# EAGLE board Weather Shield (EAGLE 7.3.0)
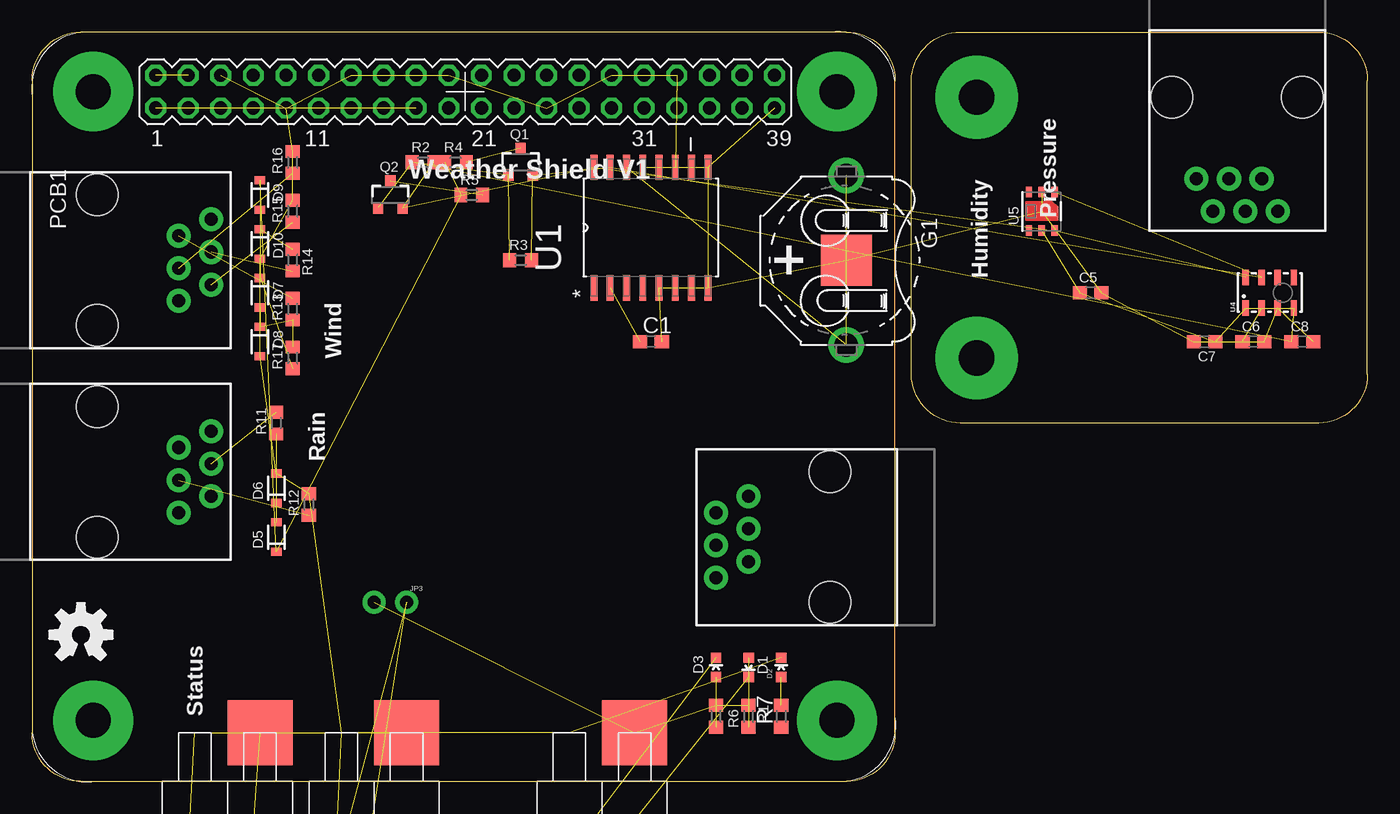
[diagram p0: board, top side]
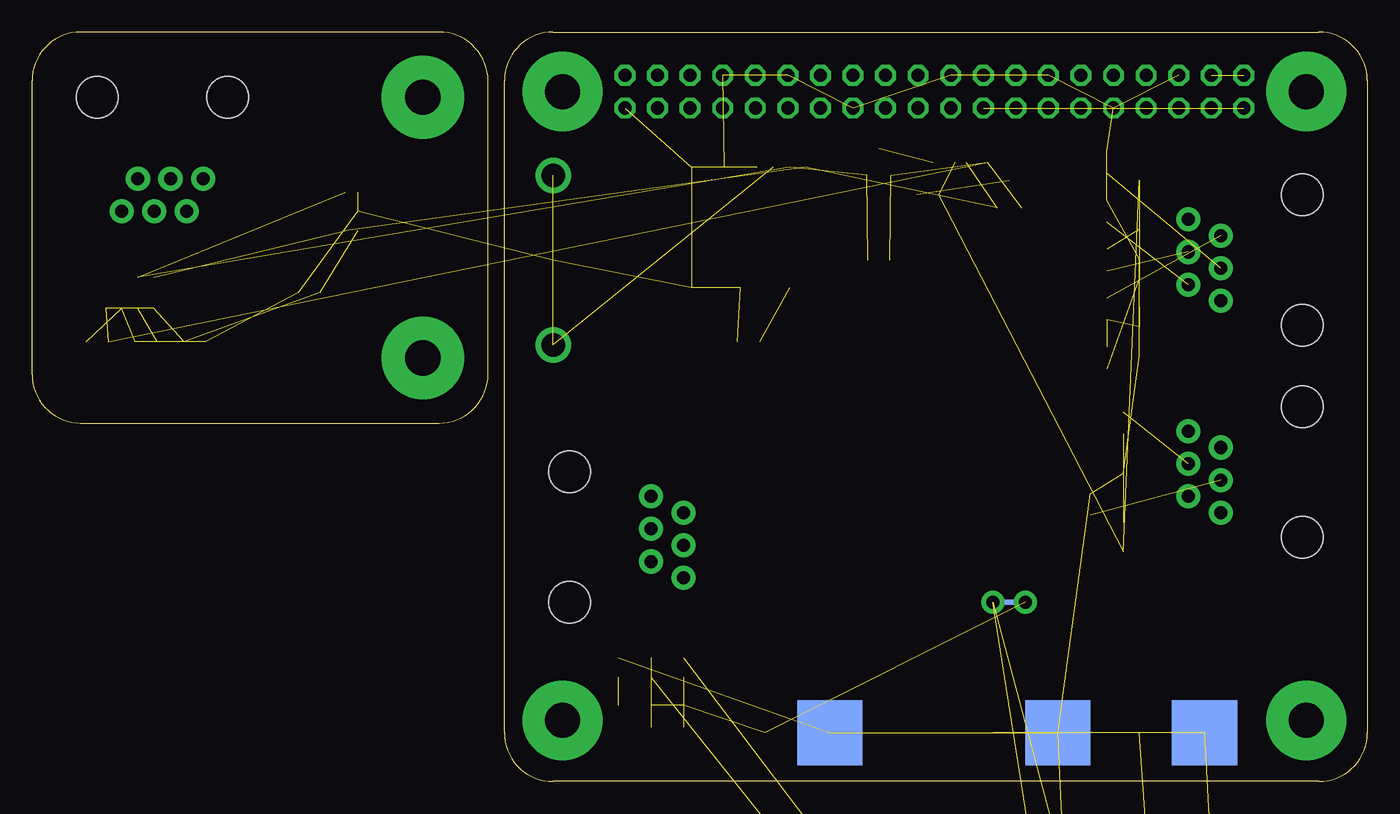
[diagram p1: board, bottom side, seen from below]

Size 104.14 x 58.42 mm. Coordinates in mm from the lower left corner, seen from the top.
Outline: 72.39,27.94 arc-90 68.58,31.75 68.58,54.61 arc-90 72.39,58.42 100.33,58.42 arc-90 104.14,54.61 104.14,31.75 arc-90 100.33,27.94 72.39,27.94
Outline: 0,54.61 arc-90 3.81,58.42 63.5,58.42 arc-90 67.31,54.61 67.31,3.81 arc-90 63.5,0 3.81,0 arc-90 0,3.81 0,54.61
Copper layers (1*16): Top 0.035mm / dielectric 1.5mm / Bottom 0.035mm
Design rules "SparkFun": minimum track width 8mil, minimum drill 20mil, track to track 8mil, track to pad 8mil, pad to pad 8mil, via to via 8mil, smd to smd 8mil, copper to edge 10mil, drill to drill 8mil, minimum pad ring 12mil, minimum via ring 10mil, stop-mask expansion 4mil, vias tented up to drill 20mil, thermal gap 10mil
Net classes: 1 vcc: width 0.203 mm
tRestrict: area 12.7,22.9 to 39.4,35.6
bRestrict: area 12.7,22.9 to 39.4,35.6

## Footprints (pad centres in the part's own frame; a part is rotated, then mirrored left to right if it is on the bottom)
C0603 = smd 1.1 x 1: 1 -0.85,0; 2 0.85,0
EIA3528 = smd 1.2 x 2.5: A 1.65,0; C -1.65,0
LED-0603 = smd 0.8 x 0.8: A 0,-0.75; C 0,0.75
SOT23 = smd 1 x 1.4: 1 -0.95,-1.1; 2 0.95,-1.1; 3 0,1.1
SOD-323 = smd 0.63 x 0.83: 1 -1.15,0; 2 1.15,0
CELL_RETAINER_11.6MM = smd 3.96 x 3.96: N- 0,0 | drill 1.85 pad 2.54: P+@1 -6.605,0; P+@2 6.605,0
SCREWTERMINAL-3.5MM-2 = drill 1.2 pad 2.032 square: 1 0,0 | drill 1.2 pad 2.032: 2 3.5,0
SJ_2S = smd 0.635 x 1.27: 1 -0.412,0; 2 0.412,0
SJ_2S-NO = smd 0.635 x 1.27: 1 -0.45,0; 2 0.45,0
PTH-JUMPER-NC_BOTTOM_NO_SILK = drill 1.016 pad 1.778: 1 -1.27,0; 2 1.27,0 | smd 1.27 x 0.381 bottom: P$1 0,0
RJ11-6 = drill 1.016 pad 1.88: 1 1.905,8.89; 2 3.175,6.35; 3 4.445,8.89; 4 5.715,6.35; 5 6.985,8.89; 6 8.255,6.35 | hole 3.251: 0,0; 10.16,0
CR75 = smd 1.75 x 4.7: P$1 0,0; P$2 6.05,0
RASPBERRY_PI_BPLUS_DIM = drill 1.016 octagon: 1 9.64,52.5; 2 9.64,55.04; 3 12.18,52.5; 4 12.18,55.04; 5 14.72,52.5; 6 14.72,55.04; 7 17.26,52.5; 8 17.26,55.04; 9 19.8,52.5; 10 19.8,55.04; 11 22.34,52.5; 12 22.34,55.04; 13 24.88,52.5; 14 24.88,55.04; 15 27.42,52.5; 16 27.42,55.04; 17 29.96,52.5; 18 29.96,55.04; 19 32.5,52.5; 20 32.5,55.04; 21 35.04,52.5; 22 35.04,55.04; 23 37.58,52.5; 24 37.58,55.04; 25 40.12,52.5; 26 40.12,55.04; 27 42.66,52.5; 28 42.66,55.04; 29 45.2,52.5; 30 45.2,55.04; 31 47.74,52.5; 32 47.74,55.04; 33 50.28,52.5; 34 50.28,55.04; 35 52.82,52.5; 36 52.82,55.04; 37 55.36,52.5; 38 55.36,55.04; 39 57.9,52.5; 40 57.9,55.04 | drill 2.75 pad 6.2: PE_BL 4.77,4.77; PE_TL 4.77,53.77; PE_TR 62.77,53.77; PE_TR1 62.77,4.77
SOT23-3 = smd 0.8 x 0.9: 1 -0.95,-1; 2 0.95,-1; 3 0,1.1
R0603 = smd 1 x 1.1: 1 -0.85,0; 2 0.85,0
S64Y = drill 0.813 long: A 2.54,1.27; E -2.54,1.27; S 0,-1.27
B1,27 = smd 1.27 x 1.27: TP 0,0
SOIC127P1032X265-16N = smd 1.981 x 0.533: 1 -4.699,4.445; 2 -4.699,3.175; 3 -4.699,1.905; 4 -4.699,0.635; 5 -4.699,-0.635; 6 -4.699,-1.905; 7 -4.699,-3.175; 8 -4.699,-4.445; 9 4.699,-4.445; 10 4.699,-3.175; 11 4.699,-1.905; 12 4.699,-0.635; 13 4.699,0.635; 14 4.699,1.905; 15 4.699,3.175; 16 4.699,4.445
MSOP-12_GND = smd 0.889 x 0.42: 1 -2.1,1.625; 2 -2.1,0.975; 3 -2.1,0.325; 4 -2.1,-0.325; 5 -2.1,-0.975; 6 -2.1,-1.625; 7 2.1,-1.625; 8 2.1,-0.975; 9 2.1,-0.325; 10 2.1,0.325; 11 2.1,0.975; 12 2.1,1.625 | smd 1.651 x 2.845: 13 0,0
LGA8 = smd 1.2 x 0.5: 1 -1.2,1.875; 2 -1.2,0.625; 3 -1.2,-0.625; 4 -1.2,-1.875; 5 1.2,-1.875; 6 1.2,-0.625; 7 1.2,0.625; 8 1.2,1.875
HTU21D = smd 0.2 x 0.2: 7 0,0 | smd 0.8 x 0.5: DATA 1.5,-1; GND 1.5,0; NC@1 -1.5,1; NC@6 1.5,1; SCK -1.5,-1; VDD -1.5,0
DEAN_CONNECTOR = smd 5.08 x 5.08: 1 2.54,3.81 | smd 5.08 x 5.08 bottom: 2 -2.54,3.81

## Placement (x,y rotation side)
C1  0.1uF  [C0603]  48.26,34.29 0 top
C2  10uF  [C0603]  16.51,-73.66 0 top  (outside the outline)
C3  47uF  [EIA3528]  22.86,-57.15 0 top  (outside the outline)
C4  47uF  [EIA3528]  -3.81,-64.77 0 top  (outside the outline)
C5  0.1uF  [C0603]  82.55,38.1 0 top
C6  0.1uF  [C0603]  95.25,34.29 0 top
C7  0.1uF  [C0603]  91.44,34.29 180 top
C8  1uF  [C0603]  99.06,34.29 0 top
C9  10uF  [C0603]  1.27,-68.58 0 top  (outside the outline)
C10  1.0uF  [C0603]  19.05,-68.58 0 top  (outside the outline)
C11  1.0uF  [C0603]  22.86,-68.58 0 top  (outside the outline)
D1  Red  [LED-0603]  55.88,8.89 180 top
D2  Blue  [LED-0603]  58.42,8.89 0 top
D3  Green  [LED-0603]  53.34,8.89 0 top
D4  ZLLS500  [SOT23]  13.97,-63.5 0 top  (outside the outline)
D5  BAS16  [SOD-323]  19.05,19.05 90 top
D6  BAS16  [SOD-323]  19.05,22.86 90 top
D7  BAS16  [SOD-323]  17.78,38.1 270 top
D8  BAS16  [SOD-323]  17.78,34.29 270 top
D9  BAS16  [SOD-323]  17.78,45.72 270 top
D10  BAS16  [SOD-323]  17.78,41.91 270 top
D11  ZLLS500  [SOT23]  17.78,-63.5 0 top  (outside the outline)
G1  3V  [CELL_RETAINER_11.6MM]  63.5,40.64 270 top
J7  M023.5MM  [SCREWTERMINAL-3.5MM-2]  3.81,-57.15 0 top  (outside the outline)
J8  M023.5MM  [SCREWTERMINAL-3.5MM-2]  12.7,-57.15 0 top  (outside the outline)
JP1  [SJ_2S]  8.89,-74.93 0 top  (outside the outline)
JP2  [SJ_2S-NO]  12.7,-74.93 0 top  (outside the outline)
JP3  JUMPER-PTH-2-NC  [PTH-JUMPER-NC_BOTTOM_NO_SILK]  27.94,13.97 180 top
JP9-DNP  RJ11-RAIN  [RJ11-6]  5.08,29.21 270 top
JP9-DNP1  [RJ11-6]  62.23,13.97 90 top
JP9-DNP2  [RJ11-6]  99.06,53.34 180 top
JP10-DNP  RJ11-WIND  [RJ11-6]  5.08,45.72 270 top
L1  68uH  [CR75]  2.54,-46.99 0 top  (outside the outline)
LOGO1  OSHW-LOGOM  [OSHW-LOGO-M]  3.81,11.43 0 top
PCB1  RASPBERRY_PI_B+/PI2_DIM  [RASPBERRY_PI_BPLUS_DIM]  0,0 0 top
Q1  BSS138  [SOT23-3]  38.1,48.26 0 top
Q2  BSS138  [SOT23-3]  27.94,45.72 0 top
R1  1K  [R0603]  55.88,5.08 270 top
R2  4.7K  [R0603]  30.48,48.26 0 top
R3  4.7K  [R0603]  38.1,40.64 0 top
R4  4.7K  [R0603]  33.02,48.26 0 top
R5  4.7K  [R0603]  34.29,45.72 0 top
R6  1K  [R0603]  53.34,5.08 270 top
R7  1K  [R0603]  58.42,5.08 90 top
R8  0.2  [R0603]  6.35,-68.58 0 top  (outside the outline)
R9  9.1k  [R0603]  26.67,-68.58 0 top  (outside the outline)
R10  24k  [R0603]  -6.35,-73.66 0 top  (outside the outline)
R11  1K  [R0603]  19.05,27.94 90 top
R12  1K  [R0603]  21.59,21.59 90 top
R13  1K  [R0603]  20.32,36.83 90 top
R14  1K  [R0603]  20.32,40.64 270 top
R15  1K  [R0603]  20.32,44.45 90 top
R16  1K  [R0603]  20.32,48.26 90 top
R17  4.7K  [R0603]  20.32,33.02 90 top
R20  220k  [R0603]  5.08,-73.66 0 top  (outside the outline)
R21  not fitted  [R0603]  -6.35,-93.98 0 top  (outside the outline)
R22  10k  [S64Y]  -2.54,-86.36 0 top  (outside the outline)
R23  not fitted  [R0603]  -6.35,-97.79 0 top  (outside the outline)
TP1  SET  [B1,27]  -6.35,-80.01 0 top  (outside the outline)
U1  DS3231SN  [SOIC127P1032X265-16N]  48.26,43.18 90 top
U2  LT3652  [MSOP-12_GND]  -5.08,-69.85 0 top  (outside the outline)
U4  MPL3115A2LGA8  [LGA8]  96.52,38.1 90 top
U5  HTU21D  [HTU21D]  78.74,44.45 90 top
U$1  DEAN_CONNECTOR  [DEAN_CONNECTOR]  15.24,0 0 top
U$2  DEAN_CONNECTOR  [DEAN_CONNECTOR]  26.67,0 0 top
U$3  DEAN_CONNECTOR  [DEAN_CONNECTOR]  44.45,0 0 top

## Library data of the parts
C1 C2 C5-C11 R1-R17 R20 R21 R23 = rcl
C3 C4 = SparkFun-Capacitors; PROD_ID: CAP-08310
D1-D3 D5-D10 JP9-DNP JP9-DNP1 JP9-DNP2 JP10-DNP Q1 Q2 = SparkFun
D4 D11 = SparkFun-DiscreteSemi; PROD_ID: DIO-08411
G1 = battery; MF: KEYSTONE; MPN: 2997; OC_FARNELL: 2293265
J7 J8 = SparkFun-Connectors
JP1-JP3 = SparkFun-Passives
L1 = SparkFun-Passives; PROD_ID: NDUC-09739
LOGO1 = SparkFun-Aesthetics
PCB1 U$1-U$3 = FSE_Weather_Shield
R22 = pot
TP1 = testpad
U1 = FSE_Weather_Shield; MPN: DS3231SN#; OC_FARNELL: 1593292; OC_NEWARK: 68K3406; PACKAGE: SOIC-16; SUPPLIER: Maxim
U2 = SparkFun-PowerIC
U4 U5 = SparkFun-Sensors

## Nets
3.3V: C5.1 C7.1 C8.1 Q1.1 Q2.1 R2.1 R3.1 U4.1 U4.4 U5.VDD
3V3: PCB1.1 PCB1.17
5V: D5.1 D7.1 D9.1 R4.1 R5.1 R17.1
5V0: PCB1.2 PCB1.4
!CHRG: D3.C U2.4
!FAULT: D1.C U2.5
BOOST: C10.1 D11.3 U2.11
FB: R9.2 R10.1 R20.2
GND [vcc]: C1.2 C2.2 C3.C C4.C C5.2 C6.2 C7.2 C8.2 C9.2 C11.1 D2.C D4.1 D6.2 D8.2 D10.2 G1.N- J8.2 PCB1.6 PCB1.9 PCB1.14 PCB1.20 PCB1.25 PCB1.30 PCB1.34 PCB1.39 R9.1 R12.2 R15.2 R16.2 R22.A U1.5 U1.6 U1.7 U1.8 U1.9 U1.10 U1.11 U1.12 U1.13 U2.13 U4.3 U5.7 U5.GND U$2.2 U$3.2
HV_SCL: Q2.3 R5.2
HV_SDA: Q1.3 R4.2
INT-PRESSURE: U4.6
N$1: JP10-DNP.3 R14.2
N$2: JP10-DNP.2 R13.2
N$3: D1.A R1.2
N$4: JP9-DNP.3 R11.2
N$5: C6.1 U4.2
N$6: G1.P+@1 G1.P+@2 U1.14
N$7: D3.A R6.2
N$10: D2.A R7.2
N$11: JP9-DNP.4 R12.1
N$12: JP10-DNP.5 R15.1
N$13: JP10-DNP.4 R16.1
N$14: J7.2 J8.1 JP1.1 U$1.2 U$2.1
N$15: R20.1 U2.7
N$16: C3.A C4.A C9.1 D11.1 JP3.1 R8.2 R10.2 R21.2 R23.2 U2.9
RAIN: D5.2 D6.1 R11.1
RAIN2: JP9-DNP.2
RAIN5: JP9-DNP.5
SCL: Q2.2 R2.2 U1.16 U4.8 U5.SCK
SDA: Q1.2 R3.2 U1.15 U4.7 U5.DATA
SENSE: L1.P$2 R8.1 R21.1 R23.1 U2.10
SET: R22.S TP1.TP U2.2
SFSASDF: J7.1 JP2.1 U$1.1
STAT3: R7.1
SW: C10.2 D4.3 L1.P$1 U2.12
TIMER: C11.2 U2.6
V_BATT: JP3.2 R1.1 R6.1 U$3.1
VCC: C1.1 U1.2
VIN: C2.1 JP1.2 JP2.2 R22.E U2.1 U2.3
WDIR: D7.2 D8.1 R13.1 R17.2
WSPEED: D9.2 D10.1 R14.1

## Tracks (layer width: path | path; a pad name or v marks a point on that pad's centre or on a via)
3.3V  (9 unrouted)
3V3  (1 unrouted)
5V  (5 unrouted)
5V0  (1 unrouted)
!CHRG  (1 unrouted)
!FAULT  (1 unrouted)
BOOST  (2 unrouted)
FB  (2 unrouted)
GND  (44 unrouted)
HV_SCL  (1 unrouted)
HV_SDA  (1 unrouted)
N$1  (1 unrouted)
N$2  (1 unrouted)
N$3  (1 unrouted)
N$4  (1 unrouted)
N$5  (1 unrouted)
N$6  (2 unrouted)
N$7  (1 unrouted)
N$8  (via drill 2.75 pad 6.45)
  other vias: 73.66,33.02
N$9  (via drill 2.75 pad 6.45)
  other vias: 73.66,53.34
N$10  (1 unrouted)
N$11  (1 unrouted)
N$12  (1 unrouted)
N$13  (1 unrouted)
N$14  (4 unrouted)
N$15  (1 unrouted)
N$16  (9 unrouted)
RAIN  (2 unrouted)
SCL  (4 unrouted)
SDA  (4 unrouted)
SENSE  (4 unrouted)
SET  (2 unrouted)
SFSASDF  (2 unrouted)
SW  (3 unrouted)
TIMER  (1 unrouted)
V_BATT  (3 unrouted)
VCC  (1 unrouted)
VIN  (5 unrouted)
WDIR  (3 unrouted)
WSPEED  (2 unrouted)

## Text on the board
tPlace: Weather Shield V1 | Pressure | Humidity | Wind | Rain | Status
tValues: N. Seidle